# EAGLE board Ranger I2C (EAGLE 6.1)
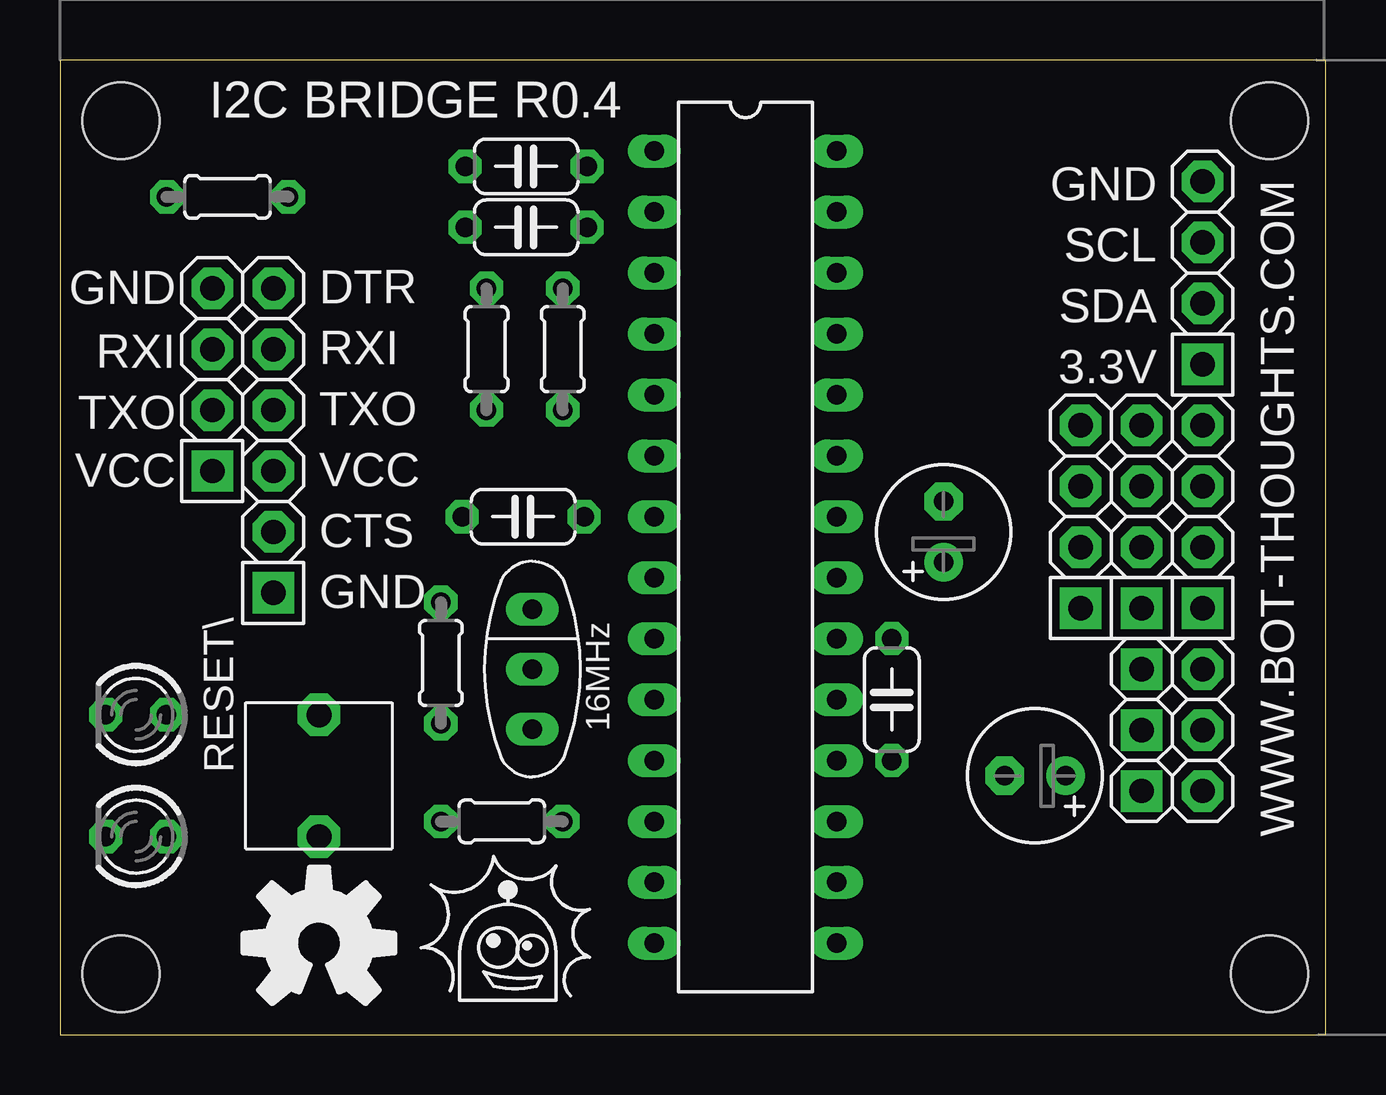
[diagram p0: board, top side]
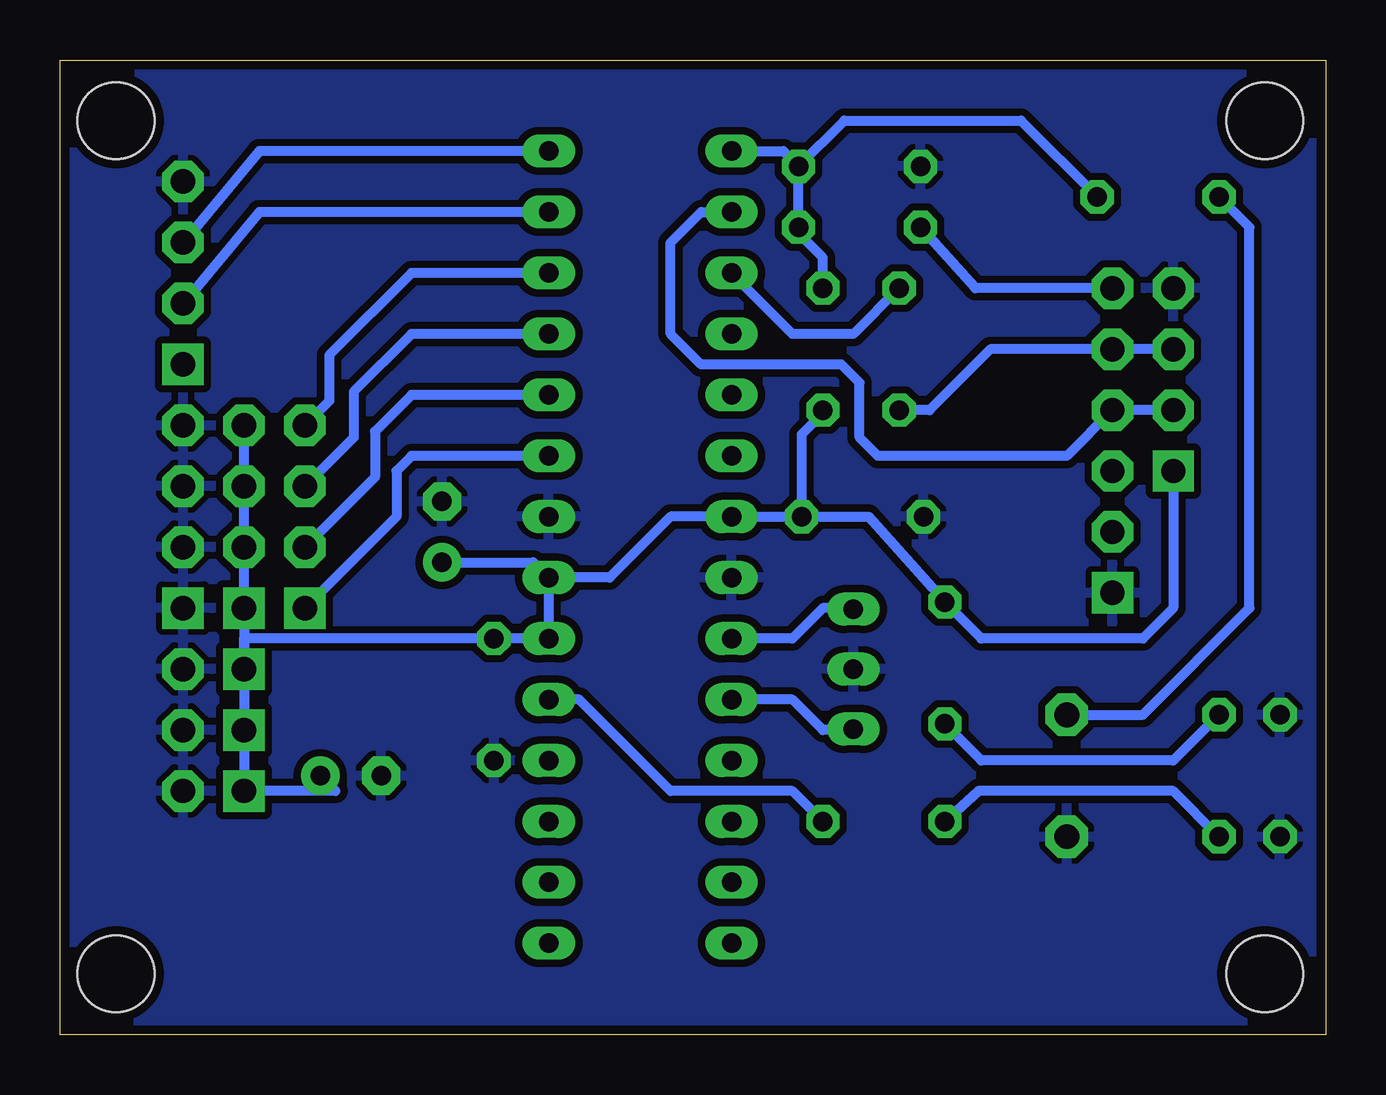
[diagram p1: board, bottom side, seen from below]

Size 52.76 x 40.63 mm. Coordinates in mm from the lower left corner, seen from the top.
Outline: 0,0 52.76,0 52.76,40.63 0,40.63 0,0
Copper layers (1*16): Top 0.0356mm / dielectric 1.5011mm / Bottom 0.0356mm
Design rules: minimum track width 6mil, minimum drill 13mil, track to track 6mil, track to pad 6mil, pad to pad 6mil, via to via 6mil, smd to smd 6mil, copper to edge 15mil, drill to drill 6mil, minimum pad ring 7mil, minimum via ring 7mil, stop-mask expansion 4mil, vias tented up to drill 0mil, thermal gap 10mil
Holes 3.2 mm at 2.54,38.1 50.42,38.1 50.42,2.54 2.54,2.54

## Footprints (pad centres in the part's own frame; a part is rotated, then mirrored left to right if it is on the bottom)
C050-024X044 = drill 0.813 octagon: 1 -2.54,0; 2 2.54,0
E2,5-6 = drill 0.813 pad 1.6: + -1.27,0 | drill 0.813 pad 1.6 octagon: - 1.27,0
DIL28-3 = drill 0.813 long: 1 -16.51,-3.81; 2 -13.97,-3.81; 3 -11.43,-3.81; 4 -8.89,-3.81; 5 -6.35,-3.81; 6 -3.81,-3.81; 7 -1.27,-3.81; 8 1.27,-3.81; 9 3.81,-3.81; 10 6.35,-3.81; 11 8.89,-3.81; 12 11.43,-3.81; 13 13.97,-3.81; 14 16.51,-3.81; 15 16.51,3.81; 16 13.97,3.81; 17 11.43,3.81; 18 8.89,3.81; 19 6.35,3.81; 20 3.81,3.81; 21 1.27,3.81; 22 -1.27,3.81; 23 -3.81,3.81; 24 -6.35,3.81; 25 -8.89,3.81; 26 -11.43,3.81; 27 -13.97,3.81; 28 -16.51,3.81
1X02-S = drill 1.016 square: 1 -1.27,0 | drill 1.016 octagon: 2 1.27,0
1X04-S = drill 1.016 square: 1 -3.81,0 | drill 1.016 octagon: 2 -1.27,0; 3 1.27,0; 4 3.81,0
1X06-S = drill 1.016 square: 1 -6.35,0 | drill 1.016 octagon: 2 -3.81,0; 3 -1.27,0; 4 1.27,0; 5 3.81,0; 6 6.35,0
LED3MM = drill 0.813 octagon: A -1.27,0; K 1.27,0
CSTLS_G9 = drill 0.813 long: 1 -2.5,0; 2 0,0; 3 2.5,0
0204/5 = drill 0.813 octagon: 1 -2.54,0; 2 2.54,0
EVQ11X09 = drill 1.041 pad 1.676 octagon: 1 0,0; 2 5.08,0

## Placement (x,y rotation side)
C1  0.1uF  [C050-024X044]  19.43,33.66 180 top
C2  0.1uF  [C050-024X044]  19.43,36.2 180 top
C3  0.1uF  [C050-024X044]  19.3,21.59 180 top
C4  0.1uF  [C050-024X044]  34.67,13.97 270 top
C5  470uF  [E2,5-6]  40.64,10.79 180 top
C6  10uF  [E2,5-6]  36.83,20.95 90 top
IC1  ATmega328P  [DIL28-3]  28.57,20.32 270 top
J1  PWR  [1X02-S]  46.35,15.24 0 top
J2  I2C  [1X04-S]  47.62,31.75 90 top
J3  FTDI  [1X06-S]  8.89,24.77 90 top
J4  AN  [1X04-S]  42.55,21.59 90 top
J5  5V  [1X04-S]  45.09,21.59 90 top
J6  GND  [1X04-S]  47.62,21.59 90 top
J7  PWR  [1X02-S]  46.35,12.7 0 top
J8  PWR  [1X02-S]  46.35,10.16 0 top
J9  CAM  [1X04-S]  6.35,27.3 90 top
LED1  STAT1  [LED3MM]  3.17,8.26 180 top
LED2  STAT1  [LED3MM]  3.17,13.34 180 top
Q1  16MHz  [CSTLS_G9]  19.68,15.24 270 top
R1  1K  [0204/5]  20.95,28.57 270 top
R2  330  [0204/5]  18.41,8.89 180 top
R5  330  [0204/5]  6.99,34.92 180 top
R6  1K  [0204/5]  17.78,28.57 270 top
R7  330  [0204/5]  15.88,15.49 270 top
S1  RESET\  [EVQ11X09]  10.79,8.26 90 top

## Library data of the parts
C1 = rcl; PARTNO: CC0603ZRY5V7BB104
C2-C4 = rcl; DATABASE: ./../../../eagle/PARTSDB.TXT; PARTNO: C1608X5R0J105K
C5 C6 = rcl
IC1 = atmel; OC_FARNELL: unknown; OC_NEWARK: unknown; PARTNO: DEV-10524
J1 = pinhead-2
J2 = pinhead-2; PARTNO: 2211S-04G
J3 = pinhead-2; PARTNO: 2211S-06G
J4-J6 J9 = pinhead-2; DATABASE: ./../../../eagle/PARTSDB.TXT; PARTNO: 2211S-04G
J7 J8 = pinhead-2; DATABASE: ./../../../eagle/PARTSDB.TXT
LED1 = led; BOM: EXCLUDE
LED2 = led; BOM: EXCLUDE; DATABASE: ./../../../eagle/PARTSDB.TXT
Q1 = murata-resonators; PARTNO: AWCR-16.00MD
R1 = rcl; BOM: EXCLUDE
R2 = rcl; PARTNO: CRCW0603330RJNEA
R5-R7 = rcl; DATABASE: ./../../../eagle/PARTSDB.TXT; PARTNO: CRCW0603330RJNEA
S1 = ads4; PARTNO: SALVAGE

## Nets
3.3V: J2.1
5V: C3.1 C4.1 C5.+ C6.+ IC1.7 IC1.20 IC1.21 J1.1 J5.1 J5.2 J5.3 J5.4 J7.1 J8.1 J9.1 R1.2 R7.1
<RXD/TXO: IC1.2 J3.4 J9.2
ADC0: IC1.23 J4.1
ADC1: IC1.24 J4.2
ADC2: IC1.25 J4.3
ADC3: IC1.26 J4.4
DTR: C1.2 J3.6
GND: C2.2 C3.2 C4.2 C5.- C6.- IC1.8 IC1.22 J1.2 J2.4 J3.1 J6.1 J6.2 J6.3 J6.4 J7.2 J8.2 J9.4 LED1.K LED2.K Q1.2 S1.1
LV_TXD/RXI>: J3.5 J9.3 R6.2
N$2: IC1.9 Q1.1
N$3: IC1.10 Q1.3
N$4: LED1.A R2.2
N$5: IC1.19 R2.1
N$6: C1.1 C2.1 IC1.1 R1.1 R5.1
N$7: R5.2 S1.2
N$8: LED2.A R7.2
RXI/TXD>: IC1.3 R6.1
SCL: IC1.28 J2.3
SDA: IC1.27 J2.2

## Tracks (layer width: path | path; a pad name or v marks a point on that pad's centre or on a via)
5V
  Bottom 0.406: IC1.21 IC1.20 C4.1 45.09,16.51 J1.1 | C3.1 19.05,21.59 R7.1 14.35,16.51 7.62,16.51 6.35,17.78 J9.1 | J1.1 J5.1 J5.2 J5.3 J5.4 | IC1.21 29.84,19.05 27.3,21.59 IC1.7 C3.1 | J1.1 J7.1 J8.1 41.27,10.16 C5.+ | R1.2 20.95,25.91 21.84,25.02 C3.1 | C6.+ 33.02,19.68 IC1.21
<RXD/TXO
  Bottom 0.406: IC1.2 26.04,34.29 27.3,33.02 27.3,29.21 26.04,27.94 20.19,27.94 19.43,27.18 19.43,24.89 18.67,24.13 10.79,24.13 J3.4 J9.2
ADC0
  Bottom 0.406: IC1.23 38.1,24.13 38.73,23.5 38.73,21.59 J4.1
ADC1
  Bottom 0.406: IC1.24 38.1,26.67 39.62,25.15 39.62,23.24 J4.2
ADC2
  Bottom 0.406: IC1.25 38.1,29.21 40.51,26.8 40.51,24.89 J4.3
ADC3
  Bottom 0.406: IC1.26 38.1,31.75 41.53,28.32 41.53,26.42 J4.4
DTR
  Bottom 0.406: J3.6 14.61,31.11 C1.2
GND
  pour Bottom (isolate 0.305): 0,40.64 52.7,40.64 52.7,0 0,0
LV_TXD/RXI>
  Bottom 0.406: R6.2 16.51,26.04 13.97,28.57 J3.5 J9.3
N$2
  Bottom 0.406: IC1.9 22.23,16.51 20.95,17.78 20.36,17.78 Q1.1
N$3
  Bottom 0.406: IC1.10 22.23,13.97 20.95,12.7 20.28,12.7 Q1.3
N$4
  Bottom 0.406: LED1.A 6.35,10.16 14.48,10.16 R2.2
N$5
  Bottom 0.406: IC1.19 31.11,13.97 27.3,10.16 22.23,10.16 R2.1
N$6
  Bottom 0.406: R1.1 20.95,32.38 21.97,33.4 C1.1 C2.1 | IC1.1 22.61,36.83 C2.1 | C2.1 20.07,38.1 12.7,38.1 R5.1
N$7
  Bottom 0.406: S1.2 7.62,13.34 3.17,17.78 3.17,33.66 R5.2
N$8
  Bottom 0.406: LED2.A 6.35,11.43 14.35,11.43 R7.2
RXI/TXD>
  Bottom 0.406: R6.1 19.68,29.21 22.23,29.21 IC1.3
SCL
  Bottom 0.406: IC1.28 44.45,36.83 J2.3
SDA
  Bottom 0.406: IC1.27 44.45,34.29 J2.2

## Text on the board
tNames: I2C BRIDGE R0.4 | GND | SCL | GND | SDA | DTR | RXI | 3.3V | RXI | TXO | TXO | VCC | VCC | CTS | GND | WWW.BOT-THOUGHTS.COM